# EAGLE board MotorAlarm2 (EAGLE 6.5.0)
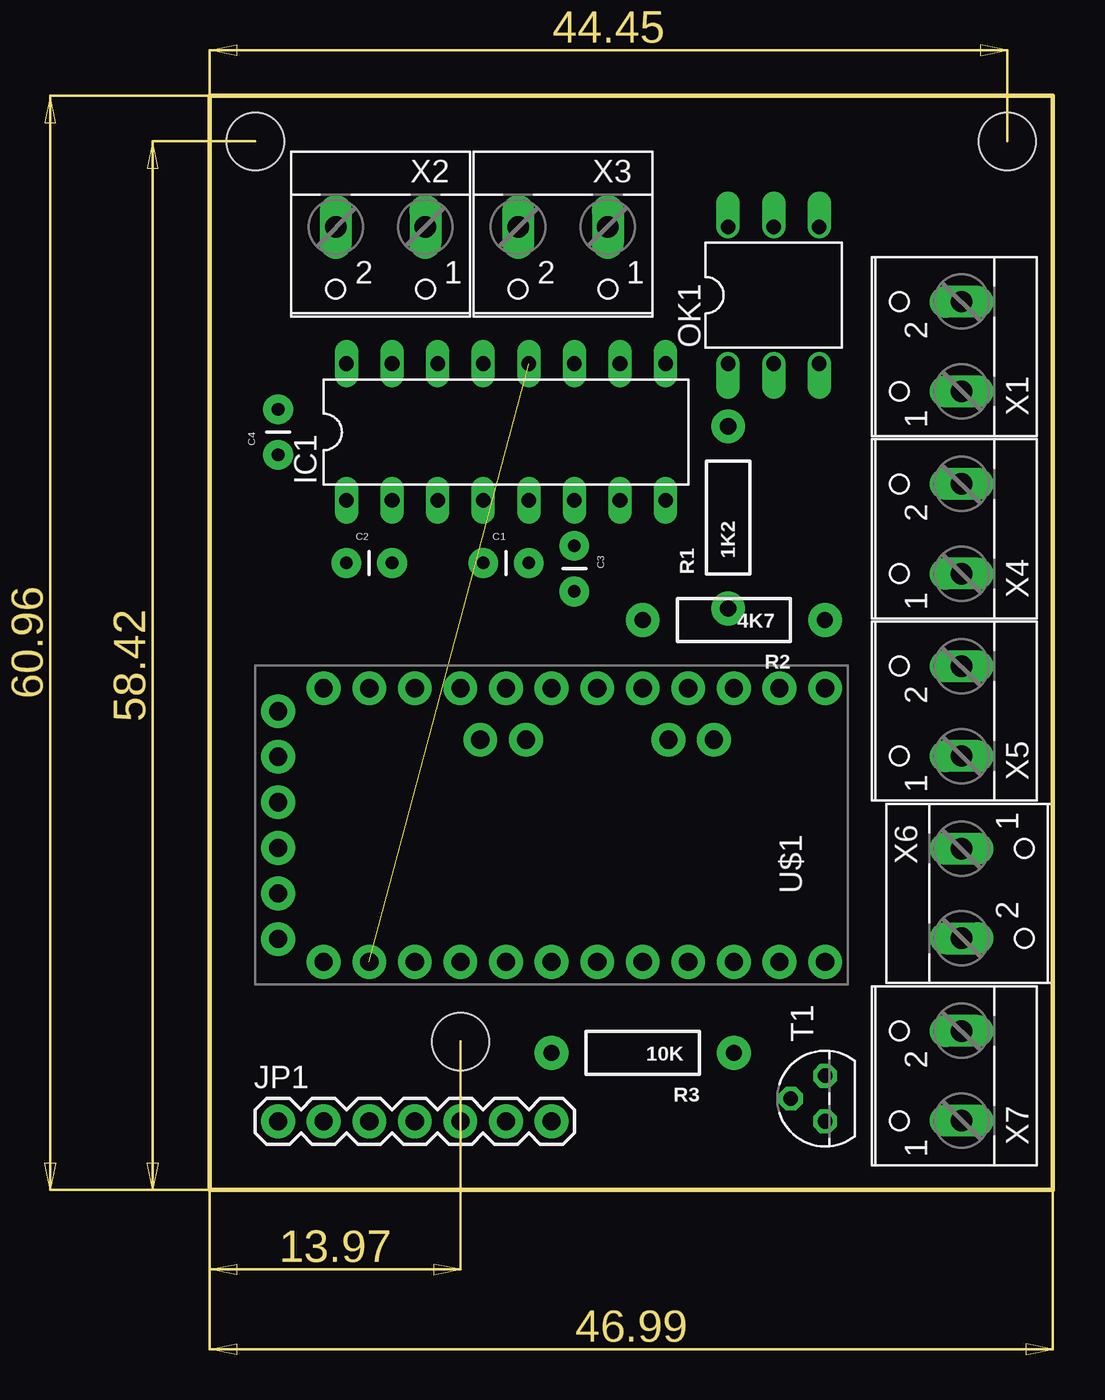
[diagram p0: board, top side]
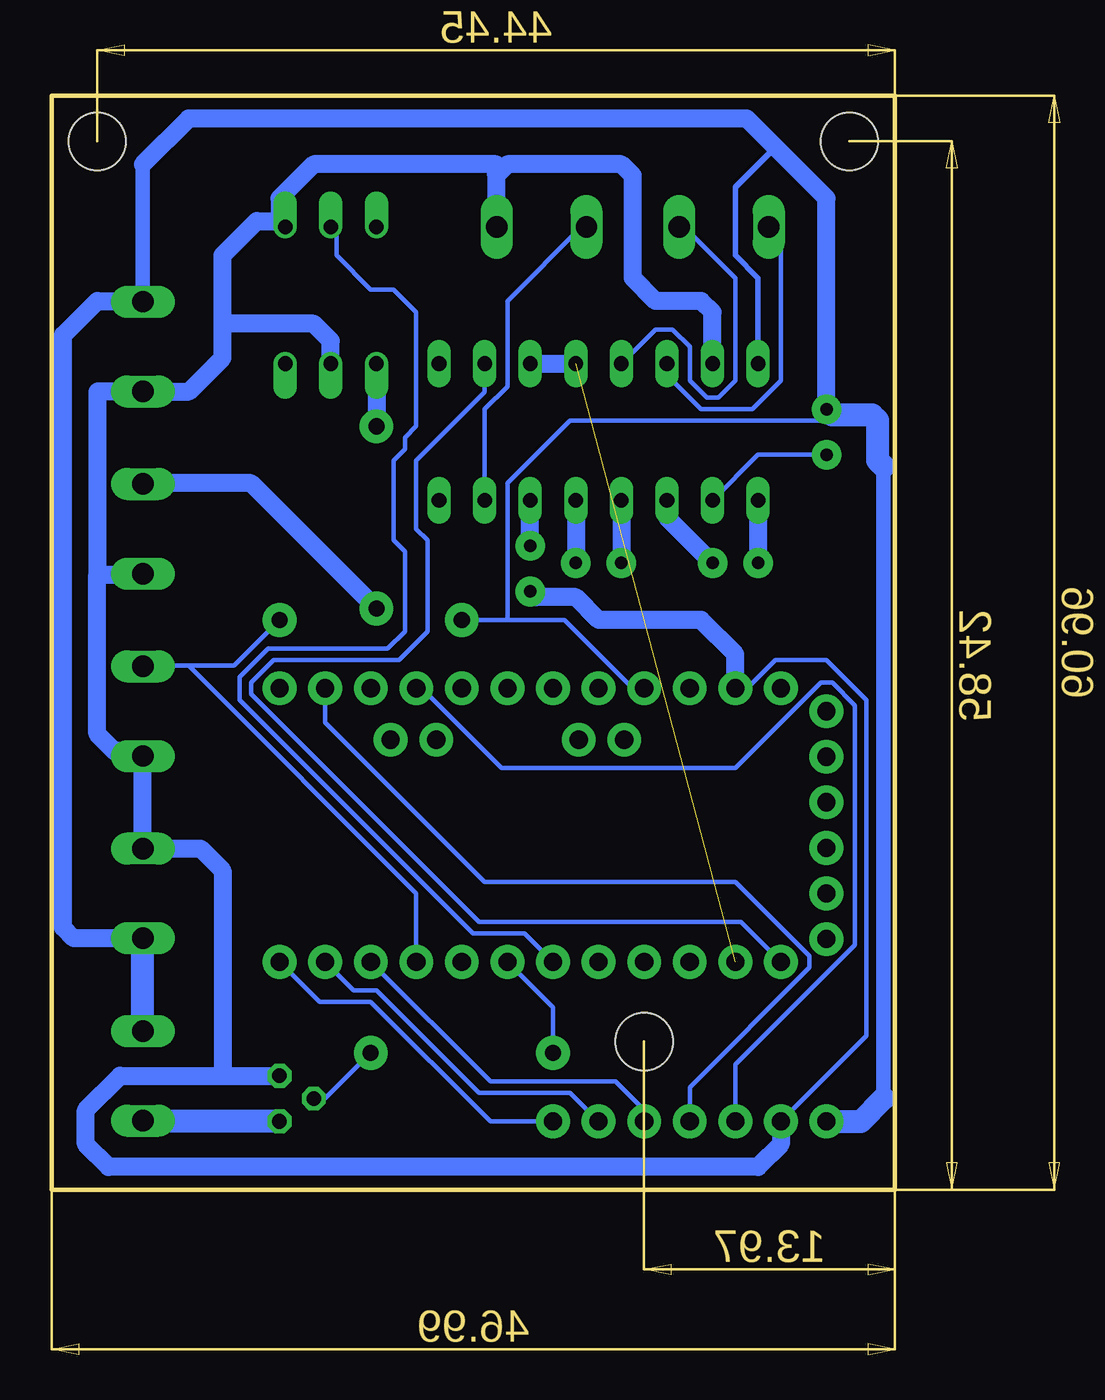
[diagram p1: board, bottom side, seen from below]

Size 46.99 x 60.96 mm. Coordinates in mm from the lower left corner, seen from the top.
Outline: 0,60.96 0,0 46.99,0 46.99,60.96 0,60.96
Copper layers (1*16): Top 0.035mm / dielectric 1.5mm / Bottom 0.035mm
Design rules "default *": minimum track width 10mil, minimum drill 24mil, track to track 8mil, track to pad 9mil, pad to pad 8mil, via to via 8mil, smd to smd 8mil, copper to edge 40mil, drill to drill 8mil, minimum pad ring 10mil, minimum via ring 8mil, stop-mask expansion 4mil, vias tented up to drill 0mil, thermal gap 10mil
Holes 3.2 mm at 2.54,58.42 44.45,58.42 13.97,8.26

## Footprints (pad centres in the part's own frame; a part is rotated, then mirrored left to right if it is on the bottom)
CAP-PTH-SMALL = drill 0.7 pad 1.651: 1 0,0; 2 2.54,0
DIL16 = drill 0.813 long: 1 -8.89,-3.81; 2 -6.35,-3.81; 3 -3.81,-3.81; 4 -1.27,-3.81; 5 1.27,-3.81; 6 3.81,-3.81; 7 6.35,-3.81; 8 8.89,-3.81; 9 8.89,3.81; 10 6.35,3.81; 11 3.81,3.81; 12 1.27,3.81; 13 -1.27,3.81; 14 -3.81,3.81; 15 -6.35,3.81; 16 -8.89,3.81
1X07 = drill 1.016 pad 1.88: 1 0,0; 2 2.54,0; 3 5.08,0; 4 7.62,0; 5 10.16,0; 6 12.7,0; 7 15.24,0
DIL06 = drill 0.813 offset: 1 -2.54,-3.81; 2 0,-3.81; 3 2.54,-3.81; 4 2.54,3.81; 5 0,3.81; 6 -2.54,3.81
AXIAL-0.4 = drill 0.9 pad 1.88: P$1 -5.08,0; P$2 5.08,0
TO92 = drill 0.813 octagon: 1 1.27,0; 2 0,1.905; 3 -1.27,0
ARDUINO_PRO_MINI = drill 1.016 pad 1.88: 1 -7.62,12.7; 2 -7.62,10.16; 3 -7.62,7.62; 4 -7.62,5.08; 5 -7.62,2.54; 6 -7.62,0; 7 -7.62,-2.54; 8 -7.62,-5.08; 9 -7.62,-7.62; 10 -7.62,-10.16; 11 -7.62,-12.7; 12 -7.62,-15.24; 13 7.62,-15.24; 14 7.62,-12.7; 15 7.62,-10.16; 16 7.62,-7.62; 17 7.62,-5.08; 18 7.62,-2.54; 19 7.62,0; 20 7.62,2.54; 21 7.62,5.08; 22 7.62,7.62; 23 7.62,10.16; 24 7.62,12.7; A4 4.763,1.429; A5 4.763,3.969; A6 4.763,-9.049; A7 4.763,-6.509; BLK -6.35,15.24; GND -3.81,15.24; GRN 6.35,15.24; RXI 1.27,15.24; TXO 3.81,15.24; VCC -1.27,15.24
W237-102 = drill 1.194 long: 1 -2.5,-1.27; 2 2.5,-1.27

## Placement (x,y rotation side)
C1  100N  [CAP-PTH-SMALL]  15.24,34.93 0 top
C2  100N  [CAP-PTH-SMALL]  7.62,34.93 0 top
C3  100N  [CAP-PTH-SMALL]  20.32,35.88 270 top
C4  100N  [CAP-PTH-SMALL]  3.81,40.96 90 top
IC1  MAX202CPE  [DIL16]  16.51,42.23 0 top
JP1  tft  [1X07]  3.81,3.81 0 top
OK1  4N35  [DIL06]  31.43,49.85 0 top
R1  1K2  [AXIAL-0.4]  28.89,37.47 90 top
R2  4K7  [AXIAL-0.4]  29.21,31.75 180 top
R3  10K  [AXIAL-0.4]  24.13,7.62 180 top
T1  BC547  [TO92]  34.29,5.08 90 top
U$1  ARDUINO_PRO_MINI  [ARDUINO_PRO_MINI]  19.05,20.32 90 top
X1  POWER  [W237-102]  40.64,46.99 90 top
X2  NMEA  [W237-102]  9.53,52.39 180 top
X3  TXD  [W237-102]  19.69,52.39 180 top
X4  MOTOR  [W237-102]  40.64,36.83 90 top
X5  SENSOR  [W237-102]  40.64,26.67 90 top
X6  SENSOR  [W237-102]  43.18,16.51 270 top
X7  ALARM  [W237-102]  40.64,6.35 90 top

## Library data of the parts
C1-C4 = SparkFun-Capacitors
IC1 = maxim; MF: MAXIM; MPN: MAX202CPE+; OC_FARNELL: 9723803; OC_NEWARK: 68K4531
JP1 = SparkFun-Connectors
OK1 = optocoupler; MF: FAIRCHILD SEMICONDUCTOR; MPN: 4N35; OC_FARNELL: 1328375; OC_NEWARK: 72K9946
R1-R3 = SparkFun-Passives
T1 = transistor
U$1 = SparkFun-Boards
X1-X7 = con-wago-500; MPN: 237-102; OC_FARNELL: unknown; OC_NEWARK: 70K9898

## Nets
ALARM: R3.P$2 U$1.7
CS: JP1.7 U$1.12
GND: C3.2 IC1.15 JP1.2 OK1.2 OK1.4 T1.1 U$1.23 X1.1 X3.1 X4.1 X5.1 X6.1
MOTOR: OK1.5 U$1.6
N$1: C1.2 IC1.5
N$2: C1.1 IC1.4
N$3: C2.2 IC1.3
N$4: C2.1 IC1.1
N$5: OK1.1 R1.P$2
N$6: IC1.14 X2.2
N$7: IC1.13 X2.1
N$8: IC1.7 X3.2
N$9: R1.P$1 X4.2
N$10: T1.3 X7.1
N$11: R3.P$1 T1.2
RES: JP1.6 U$1.11
RS/DC: JP1.5 U$1.10
RXD: IC1.11 IC1.12 U$1.2
SCL: JP1.3 U$1.16
SDA: JP1.4 U$1.14
SENSOR: R2.P$1 U$1.9 X5.2
TXD: IC1.10 U$1.1
V+: C4.1 IC1.2
V-: C3.1 IC1.6
VCC: C4.2 IC1.16 JP1.1 R2.P$2 U$1.21 X1.2 X6.2 X7.2

## Tracks (layer width: path | path; a pad name or v marks a point on that pad's centre or on a via)
ALARM
  Bottom 0.254: R3.P$2 19.05,10.16 U$1.7
CS
  Bottom 0.254: JP1.7 22.54,3.81 29.21,10.48 32.07,10.48 U$1.12
GND
  Bottom 0.254: 21.91,53.66 X3.1 | 41.91,24.45 X5.1 | U$1.23 8.26,27.94 6.67,29.53 3.81,29.53 1.59,27.3 1.59,8.57 JP1.2
  Bottom 1.016: JP1.2 6.35,2.54 7.62,1.27 43.82,1.27 45.09,2.54 45.09,4.45 43.18,6.35 37.47,6.35 | 37.47,6.35 T1.1 | 37.47,6.35 37.47,17.78 38.7,19.01 X6.1 X5.1 | 41.91,24.45 43.5,24.45 44.45,25.4 44.45,34.29 | 44.45,34.29 41.95,34.29 X4.1 | 44.45,34.29 44.45,44.45 44.41,44.49 X1.1 39.33,44.49 37.47,46.36 37.47,48.26 | U$1.23 8.89,29.84 10.79,31.75 16.51,31.75 17.78,33.02 20,33.02 C3.2 | IC1.15 10.16,48.9 10.79,49.53 13.33,49.53 14.6,50.8 14.6,56.52 15.24,57.15 21.59,57.15 22.23,56.52 | 22.23,56.52 22.23,53.7 X3.1 | 37.47,48.26 37.47,52.07 35.56,53.98 34.29,53.98 | OK1.2 31.43,47.31 32.39,48.26 37.47,48.26 | 22.23,56.52 22.23,57.15 32.39,57.15 34.29,55.25 34.29,53.98 | 34.29,53.98 OK1.4
MOTOR
  Bottom 0.254: U$1.6 20.64,14.29 23.49,14.29 36.51,27.3 36.51,28.58 34.93,30.16 28.26,30.16 27.3,31.12 27.3,35.56 27.94,36.2 27.94,40.64 27.3,41.27 27.3,41.91 26.67,42.55 26.67,48.9 27.94,50.16 29.21,50.16 31.12,52.07 31.12,53.34 OK1.5
N$1
  Bottom 1.016: IC1.5 C1.2
N$2
  Bottom 1.016: IC1.4 C1.1
N$3
  Bottom 0.254: 12.7,37.47 IC1.3
  Bottom 1.016: C2.2 12.7,37.47
N$4
  Bottom 1.016: IC1.1 C2.1
N$5
  Bottom 1.016: OK1.1 R1.P$2
N$6
  Bottom 0.254: IC1.14 12.7,45.4 10.79,43.5 7.94,43.5 6.35,45.09 6.35,53.02 6.98,53.66 X2.2
N$7
  Bottom 0.254: IC1.13 13.33,47.94 12.38,47.94 11.43,46.99 11.43,45.09 10.48,44.13 9.84,44.13 8.89,45.09 8.89,50.8 11.75,53.66 X2.1
N$8
  Bottom 0.254: IC1.7 22.86,43.5 21.59,44.77 21.59,49.53 17.46,53.66 X3.2
N$9
  Bottom 1.016: X4.2 41.87,39.37 35.88,39.37 R1.P$1
N$10
  Bottom 0.254: 41.91,3.81 X7.1
  Bottom 1.27: T1.3 41.87,3.81 X7.1
N$11
  Bottom 0.254: T1.2 31.75,5.08 R3.P$1
RES
  Bottom 0.254: U$1.11 30.16,11.11 28.89,11.11 23.18,5.4 18.1,5.4 JP1.6
RS/DC
  Bottom 0.254: U$1.10 22.54,6.03 15.56,6.03 13.97,4.45 JP1.5
RXD  (1 unrouted)
  Bottom 1.016: IC1.11 IC1.12
SCL
  Bottom 0.254: JP1.3 8.89,6.98 2.22,13.65 2.22,26.99 3.49,28.26 4.13,28.26 8.89,23.49 21.91,23.49 26.35,27.94 U$1.16
SDA
  Bottom 0.254: JP1.4 11.43,5.71 4.76,12.38 4.76,13.02 8.89,17.15 22.86,17.15 31.75,26.03 U$1.14 31.75,26.67
SENSOR
  Bottom 0.254: 39.37,29.21 36.83,29.21 R2.P$1 | 39.37,29.21 41.91,29.21 X5.2 | U$1.9 26.67,16.51 39.37,29.21
TXD
  Bottom 0.254: IC1.10 22.86,44.45 26.67,40.64 26.67,36.83 26.03,36.2 26.03,31.12 27.62,29.53 34.61,29.53 35.88,28.26 35.88,27.62 23.18,14.92 8.57,14.92 U$1.1
V+
  Bottom 0.254: IC1.2 7.62,40.96 C4.1
V-
  Bottom 1.016: C3.1 IC1.6
VCC
  Bottom 0.254: U$1.21 14.6,27.94 18.41,31.75 21.59,31.75 | R2.P$2 21.59,31.75 | C4.2 3.18,42.86 18.1,42.86 21.59,39.37 21.59,31.75
  Bottom 0.305: IC1.16 7.62,50.8 8.89,52.07 8.89,55.88 6.67,58.1
  Bottom 0.813: 0.63,5.08 0.63,40.32 | 41.91,57.15 X1.2
  Bottom 1.016: X6.2 45.76,14.01 46.36,14.6 46.36,47.62 44.45,49.53 41.95,49.53 X1.2 | C4.2 3.81,55.25 6.67,58.1 8.26,59.69 39.37,59.69 41.91,57.15
  Bottom 1.27: X7.2 X6.2 | JP1.1 1.91,3.81 0.63,5.08 | 0.63,40.32 0.95,40.64 0.95,42.86 1.27,43.18 3.49,43.18 C4.2